# Altium PCB DCtoAC.PcbDoc
Units mil, origin at the board's own origin, x right, y up, seen from the top; angles counter-clockwise.
Board outline 1968.5 x 1968.5 mil, 2 copper layers (Top Layer, Bottom Layer); 4 components, 4 nets, 10 pads, 0 vias.
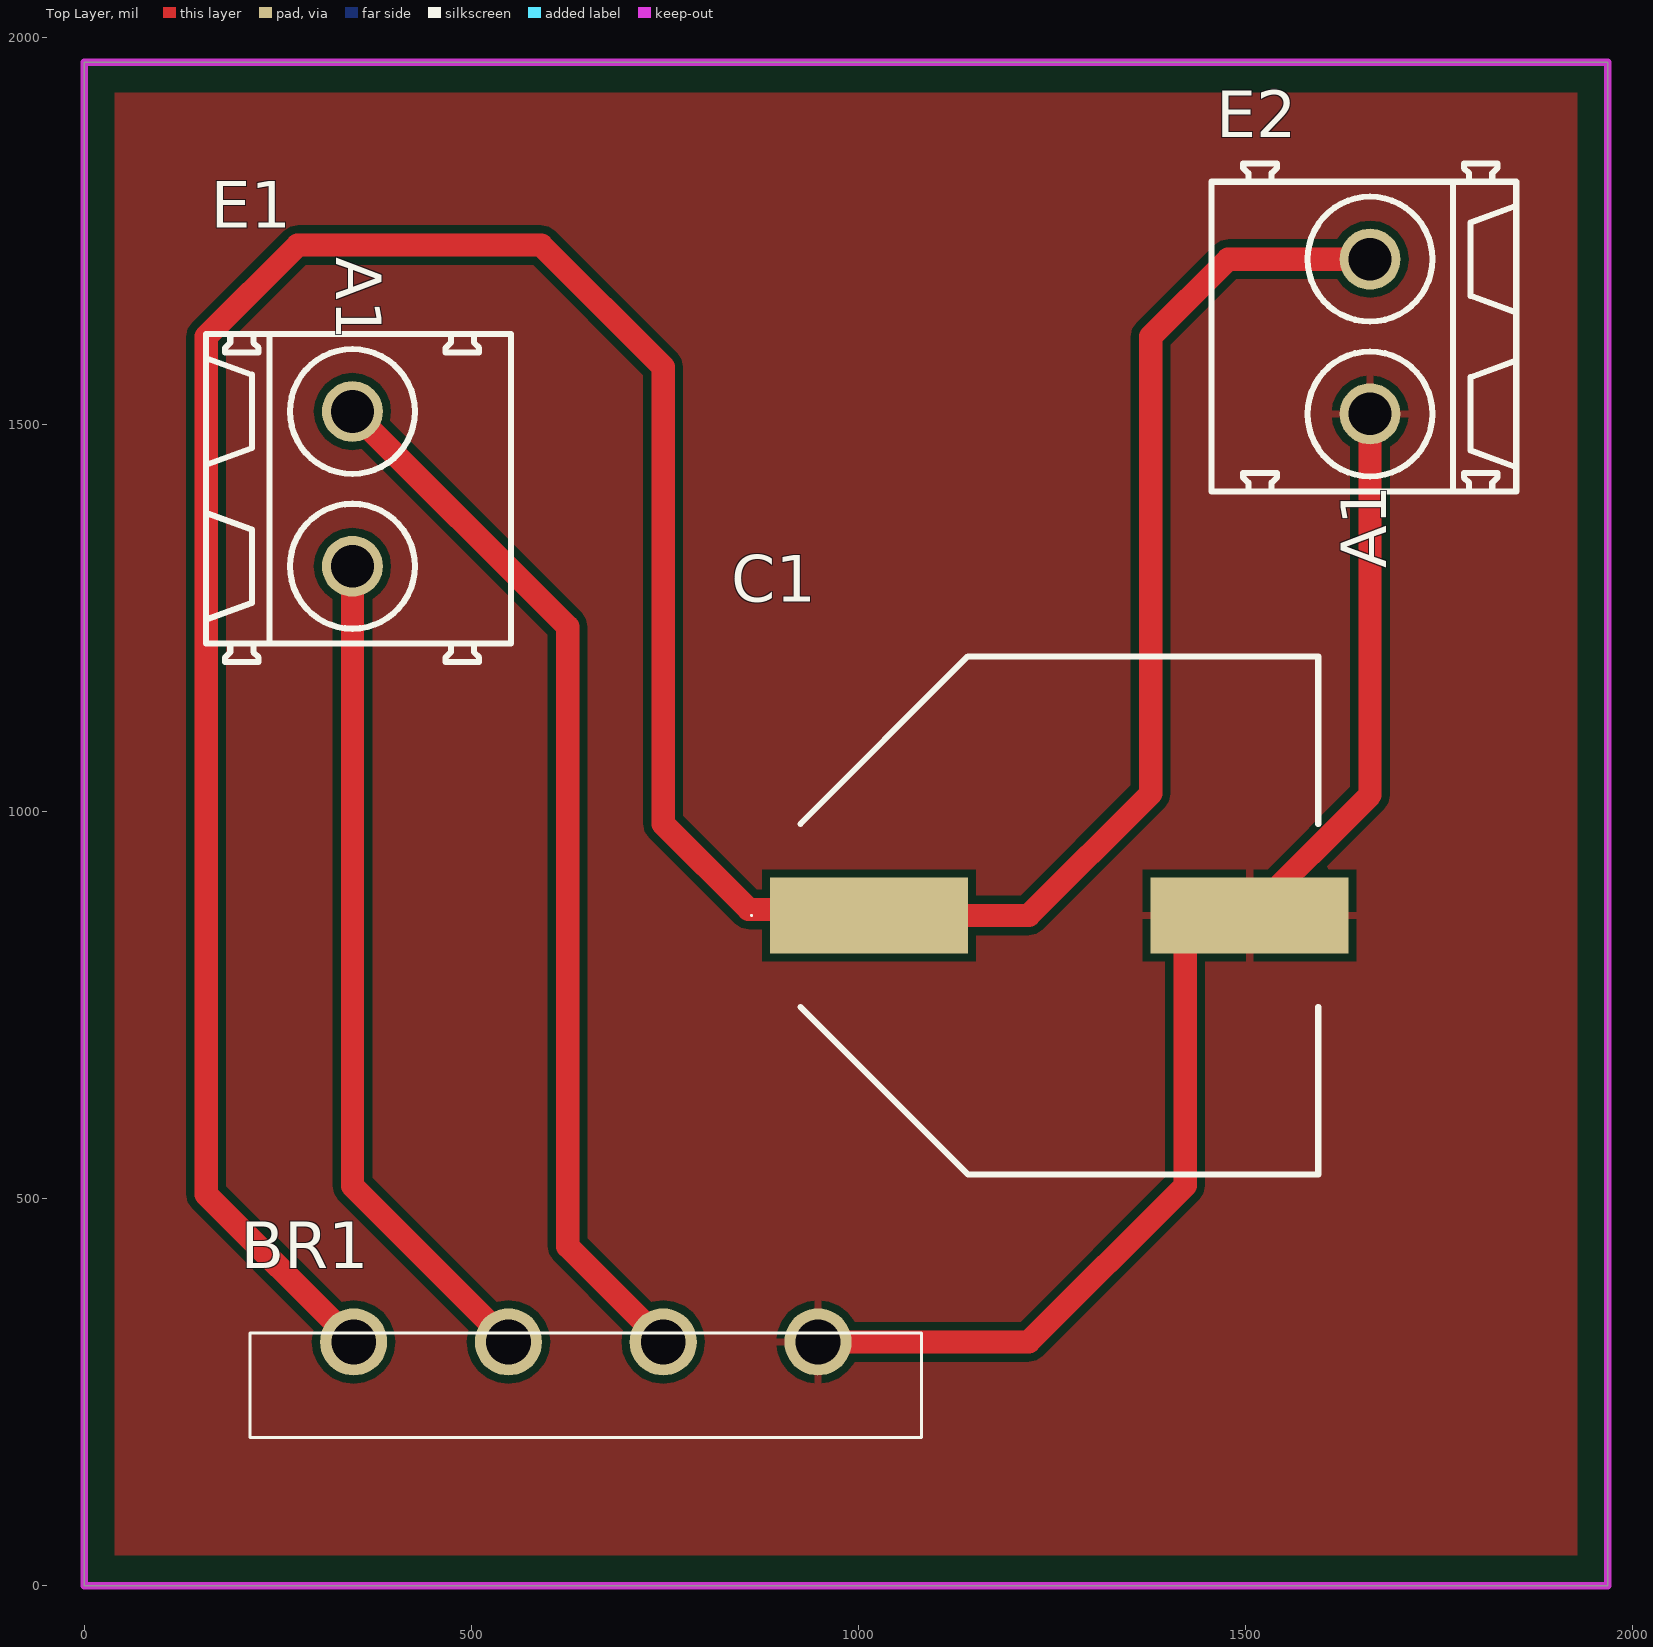
[diagram p0: Top Layer view]
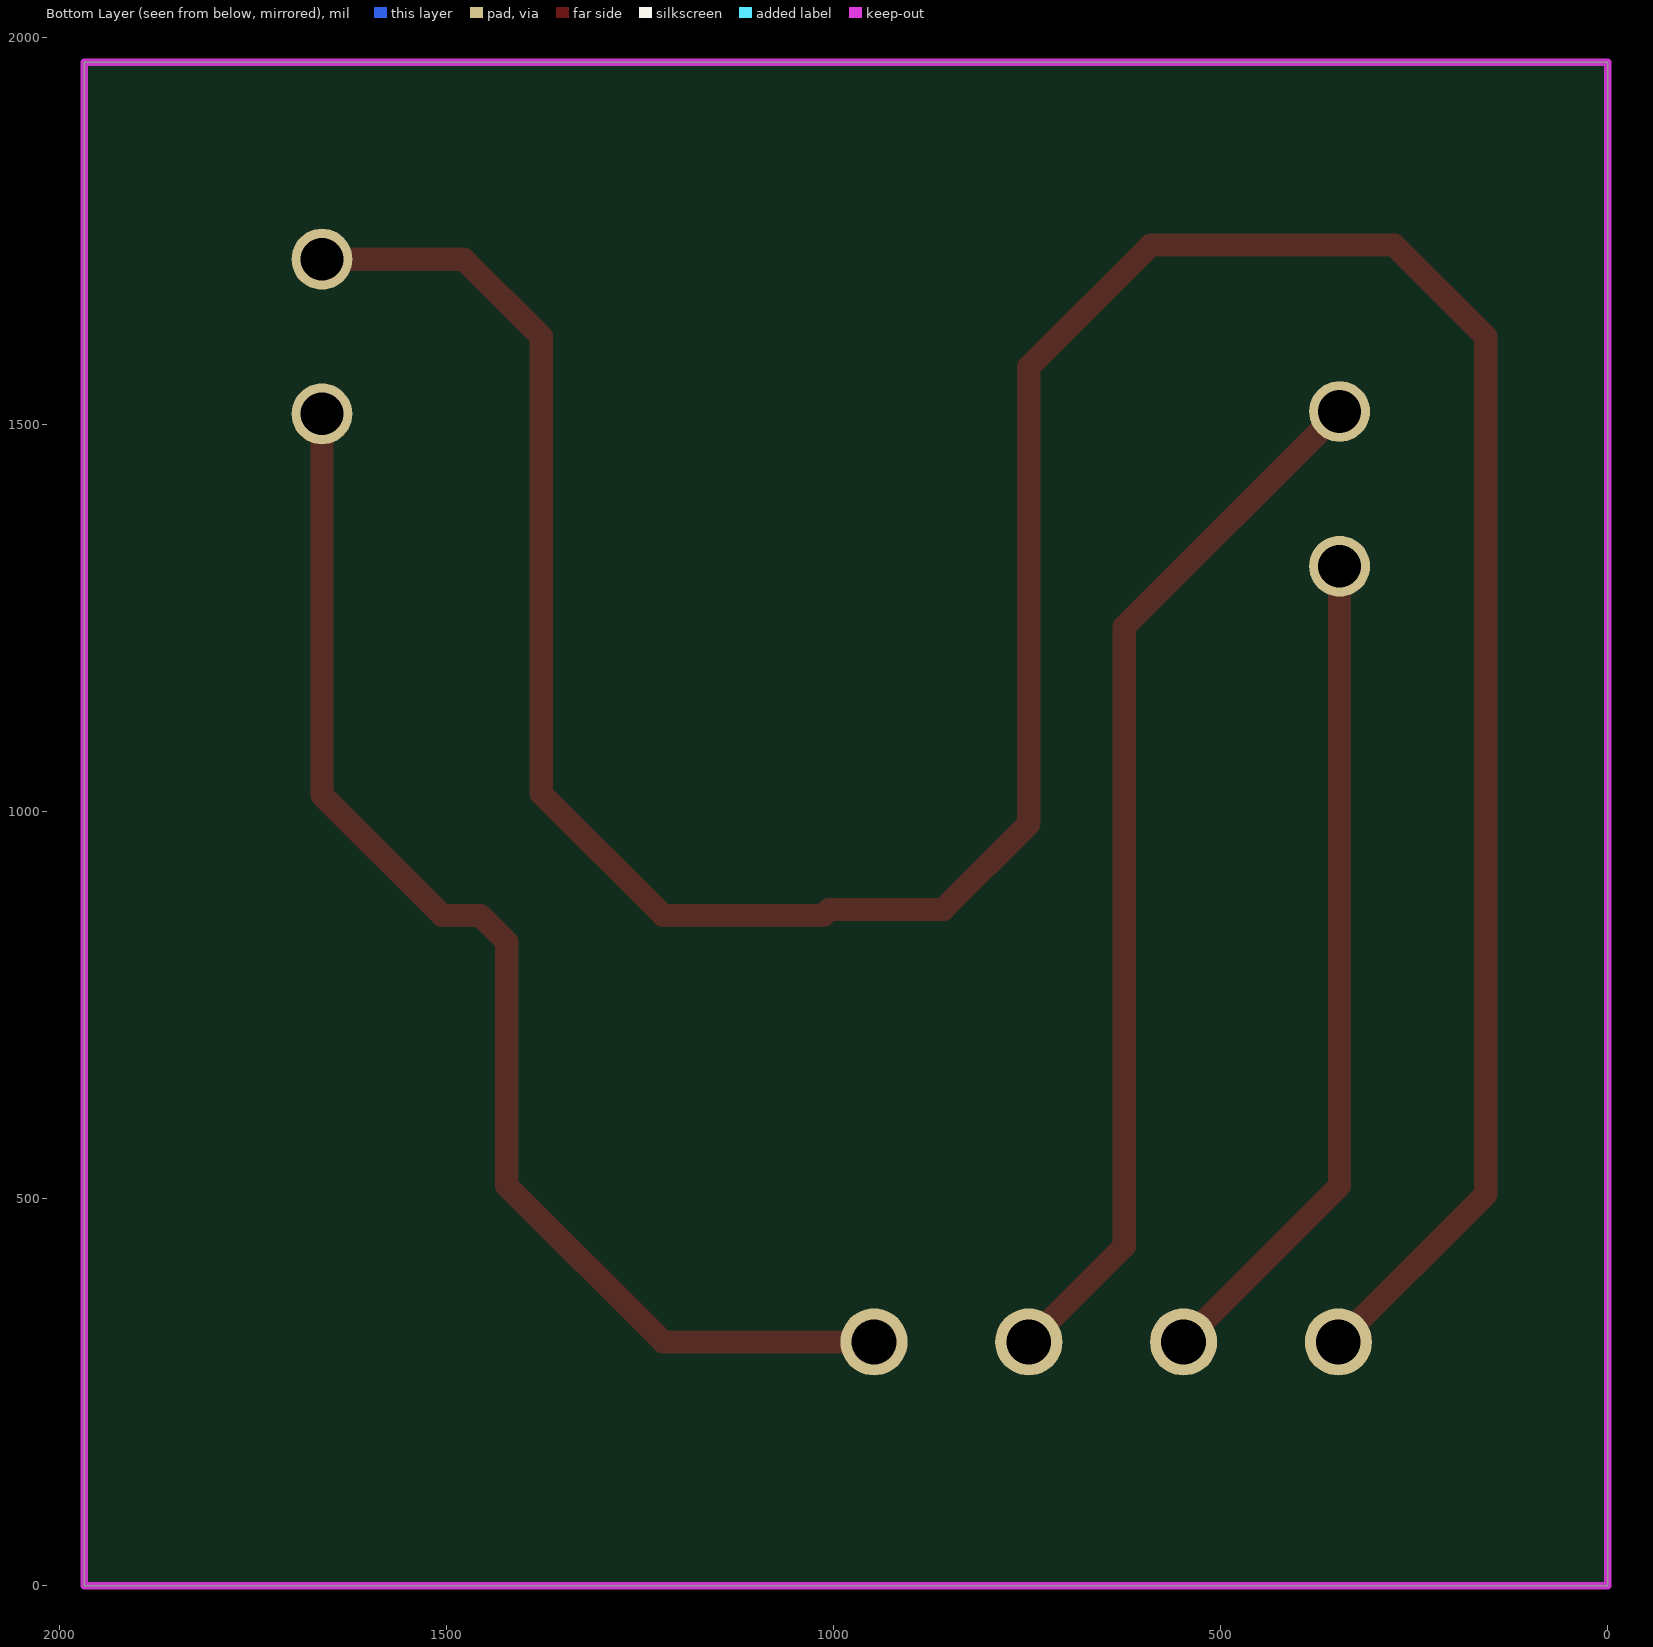
[diagram p1: Bottom Layer view, seen from below]
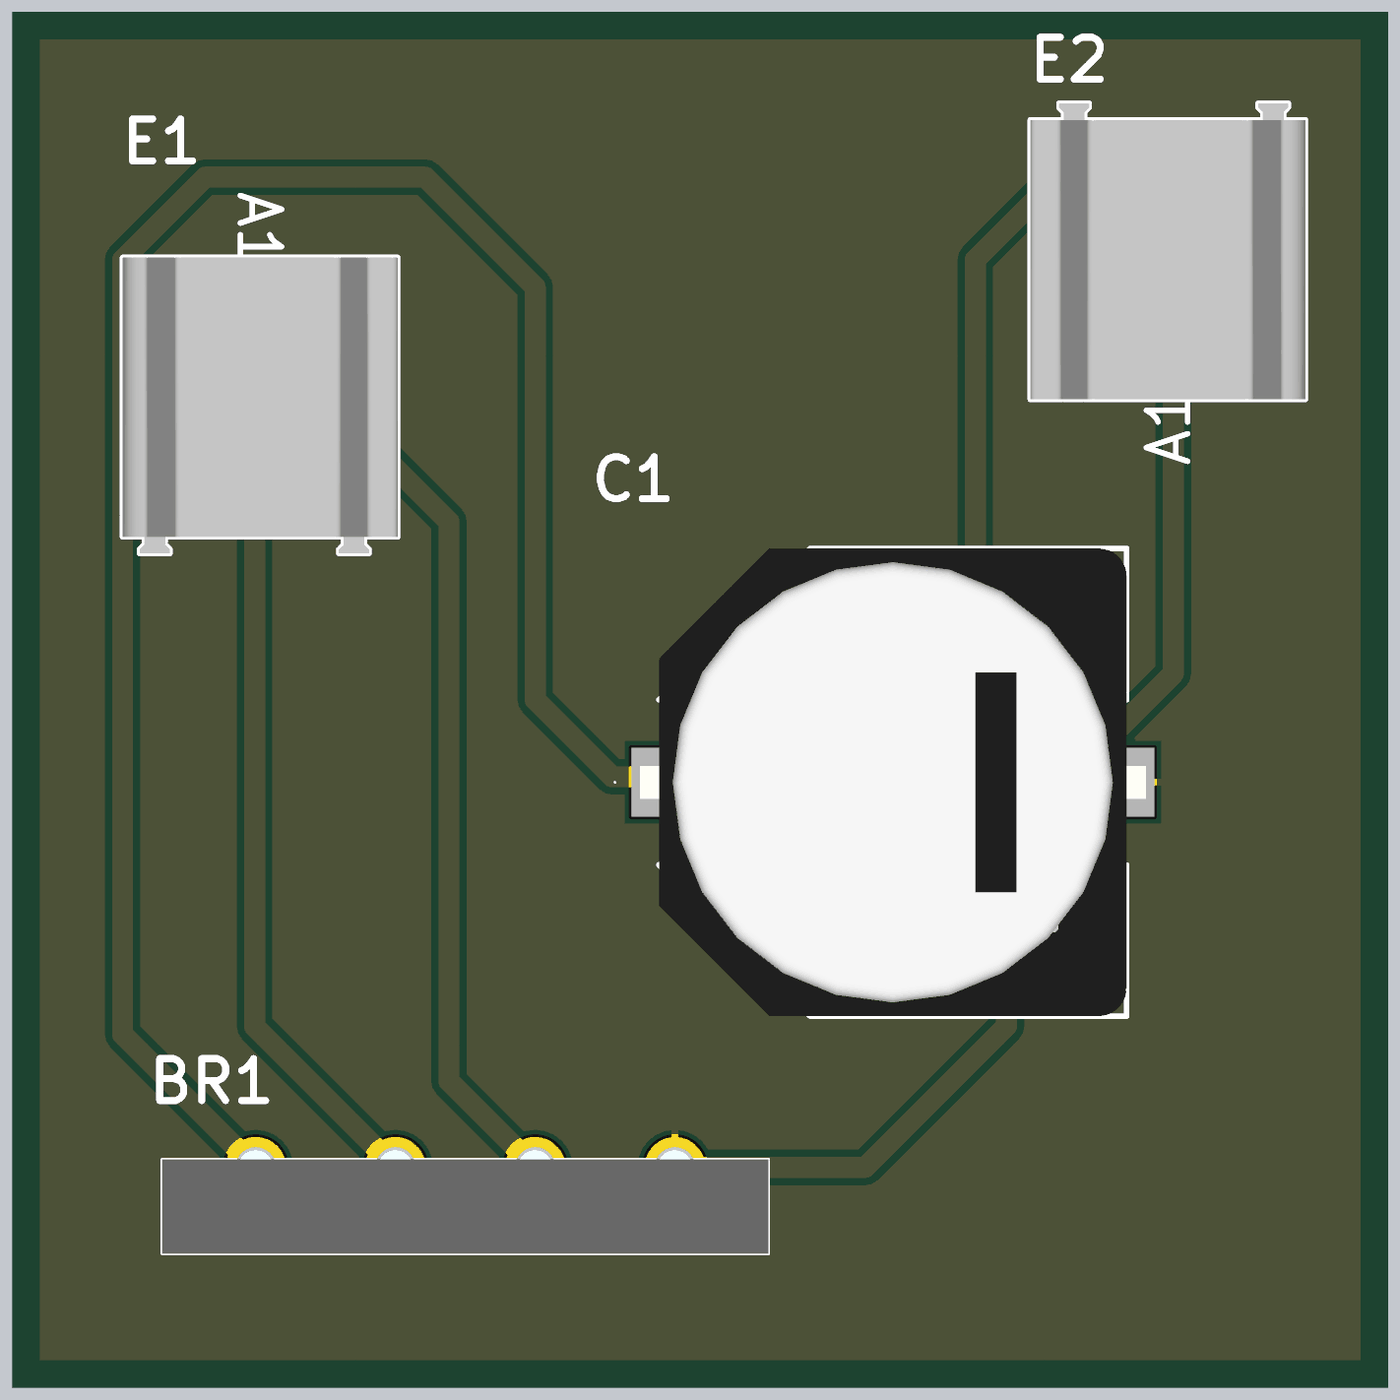
[diagram p2: 3D render of the assembled board from above, using the file's embedded part models]

## Layer stack, top to bottom
Top Solder: solder mask 0.4, Solder Resist, Dk 3.5
Top Layer: signal copper 1.4
Dielectric 1: dielectric 12.6, FR-4, Dk 4.8
Bottom Layer: signal copper 1.4
Bottom Solder: solder mask 0.4, Solder Resist, Dk 3.5

## Board outline
0,0 0,1968.5 1968.5,1968.5 1968.5,0

## Design rules (kind name [scope] priority, off if disabled: settings)
Clearance [All] p1: gap=10 ignorepadtopadclearanceinfootprint=FALSE except(20: Arc-Hole Track-Hole SMDPad-Hole THPad-Hole Via-Hole Fill-Hole Poly-Hole Region-Hole Text-Hole)
PolygonConnect [All] p1: connectstyle=Relief reliefconductorwidth=10 reliefentries=4 polygonreliefangle="90 Angle" airgapwidth=10
RoutingLayers [All] p1: top layer_v5=TRUE bottom layer_v5=FALSE
RoutingVias [All] p1: holewidth=28 width=50 viastyle="Through Hole" minholewidth=28 minwidth=50 maxholewidth=28 maxwidth=50
SolderMaskExpansion [All] p1: expansion=4 istentingtop=FALSE
Width [All] p1: maxlimit=30 minlimit=30 preferedwidth=30 minimp=50.000000 maximp=50.000000 favimp=50.000000
29 further rules are at their usual default settings.

## Components (designator, comment, footprint, x,y, rotation, side; value= is the part's Value field where it differs from the comment)
BR1 "GBUE2560-M3_P" GBUE2560M3P 348.03,314.96 r180 top
C1 "EEE-TK1H471AM" EEEFK0J682AM 1259.84,866.14 r0 top
E1 "1716080000" LM_5_08_90_02 354.33,1417.32 r270 top
E2 "1716080000" LM_5_08_90_02 1653.54,1614.17 r90 top

## Footprints (in the part's own frame and the unit in brackets; to place one, negate y for a bottom-side part, rotate by r counter-clockwise, add the part's x,y. Pads: shape width x height; smd on the part's side, far side on the other; paste and mask are expansions set on the pad)
EEEFK0J682AM [mm]
  rect 6.5x2.5 smd: 1(-6.25,0) 2(6.25,0)
  silkscreen extent -10.13,-8.5 8.5,8.5, body extent -5.34,-5.46 6.86,5.04, height 10.21
GBUE2560M3P [mm]
  round 2.205 hole 1.47: 1(0,0) 2(-5.08,0) 3(-10.16,0) 4(-15.24,0)
  silkscreen extent -18.64,-0.29 3.4,3.14, body extent -18.65,-0.63 3.4,3.14, height 18.65
LM_5_08_90_02 [mm] "OMNIMATE Signal - Serie LM  LM 5.08/02/90 3.5"
  round 2 hole 1.4: A1(-2.54,-0.2) A2(2.54,-0.2)
  silkscreen extent -5.08,-5 5.68,5, body extent -5.08,-5 5.68,5, height 13.81

## Part data
BR1: "Bridge Rectifier", Manufacturer_Name=Vishay, Manufacturer_Part_Number=GBUE2560-M3/P, Mouser2 Part Number=78-GBUE2560-M3/P, Datasheet Link=https://componentsearchengine.com//GBUE2560-M3_P.pdf, Height=18.55mm, Mouser2 Price/Stock=https://www.mouser.com/Search/Refine.aspx?Keyword=78-GBUE2560-M3%2FP
C1: "Capacitor Polarised", Manufacturer_Name=Panasonic, Datasheet Link=http://industrial.panasonic.com/cdbs/www-data/pdf/RDE0000/ABA0000C1190.pdf, Height=17mm, Manufacturer_Part_Number=EEE-TK1H471AM
E1 E2: library part CMP-1559-01766-1, "OMNIMATE Signal - series LM", Colour=Orange, Manufacturer=Weidmueller, Rated_current_use_group_B_UL_1059="15 A", Rated_voltage_for_surge_voltage_class_pollution_degree_II_2="630 V", Rated_voltage_use_group_B_UL_1059="300 V", UL_94_flammability_rating=V-0, ComponentLink1Description="Manufacturer URL", ComponentLink1URL=http://www.weidmueller.com/, ComponentLink2Description="URL Link1", ComponentLink2URL=http://catalog.weidmueller.com/catalog/Start.do?localeId=en&ObjectID=1716080000, Contact_material=Cu-Leg, Contact_surface=tinned, Insulating_material="Wemid (PA)", Mounting_onto_the_PCB="Solder connection", No_of_poles=2, PackageReference=LM_5_08_90_02, Packaging=Box, PartNumber=1716080000, Pitch_inch="0,2 inch", Pitch_mm="5,08 mm", Qty="500 PCS", Revision=V1, Short_text_for_material="LM 5.08/02/90 3.5SN OR BX", Side_termination_characteristic="closed side", Solder_pin_length_mm="3,5 mm", Solid_max_H05_07_V_U="2,5 mm²", Solid_min_H05_07_V_U="0,2 mm²", Wire_cross_section_AWG_max_UL_1059="AWG 14", Wire_cross_section_AWG_min_UL_1059="AWG 24"

## Nets (pads, with @x,y where several pads share a name; then routed paths per layer and width w, separated by ;. In a path a pad name is that pad's centre, name@x,y a point inside that pad or via, vN(x,y) a via of type N, cw(c..) or ccw(c..) an arc to the next point about the centre after c; other vN are vias at no path point)
GND: BR1.4 C1.2 E2.A1 | length 1683.1
  Top Layer w30: BR1.4 1220.47,314.96 1422.57,517.06 1422.57,831.93 1456.79,866.14 C1.2 1661.42,1021.65 E2.A1
NetBR1_1: BR1.1 C1.1 E2.A2 | length 4332.9
  Top Layer w30: BR1.1 157.48,505.51 157.48,1614.17 275.59,1732.28 590.55,1732.28 748.03,1574.8 748.03,984.25 858.4,873.88 1006.04,873.88 C1.1 1220.47,866.14 1377.95,1023.62 1377.95,1614.17 1477.95,1714.17 E2.A2
NetBR1_2: BR1.2 E1.A2 | length 1085.9
  Top Layer w30: E1.A2 346.46,516.54 BR1.2
NetBR1_3: BR1.3 E1.A1 | length 1368.7
  Top Layer w30: E1.A1 624.6,1239.18 624.6,438.4 BR1.3

## Polygon pours and split planes (outlines as drawn)
GND on Top Layer "GND_L01_P000" (solid, pour order 0): 39.37,1929.13 39.37,39.37 1929.13,39.37 1929.13,1929.13

## Keep-outs
Keep-Out Layer:
  the board outline again, w10

## Text inside footprints (layer, text, board x,y; h text height)
E1: Top Overlay "A1" at 325.61,1716.71 h59.06 r270
E2: Top Overlay "A1" at 1682.26,1314.78 h59.06 r90